# Altium PCB Reflectance.PcbDoc
Units mm, origin at the board's own origin, x right, y up, seen from the top; angles counter-clockwise.
Board outline 55.75 x 84.25 mm, 2 copper layers (Top Layer, Bottom Layer); 29 components, 116 nets, 107 pads, 0 vias.
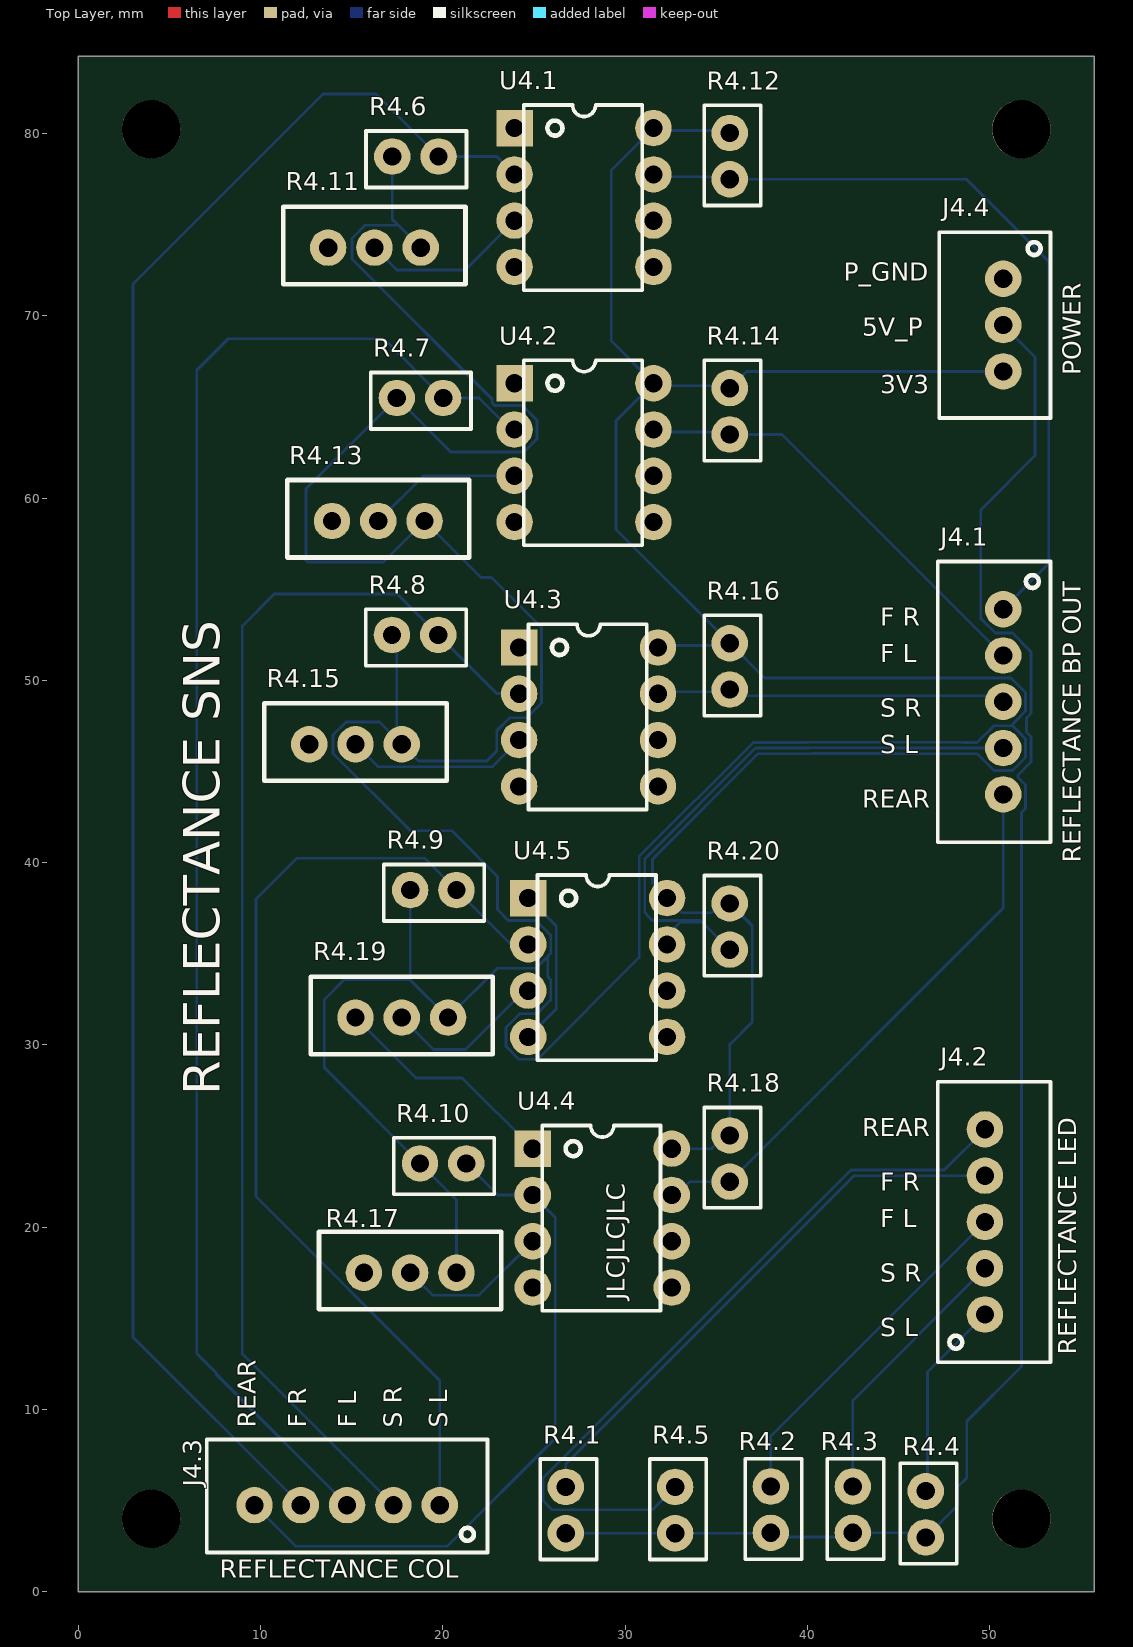
[diagram p0: Top Layer view]
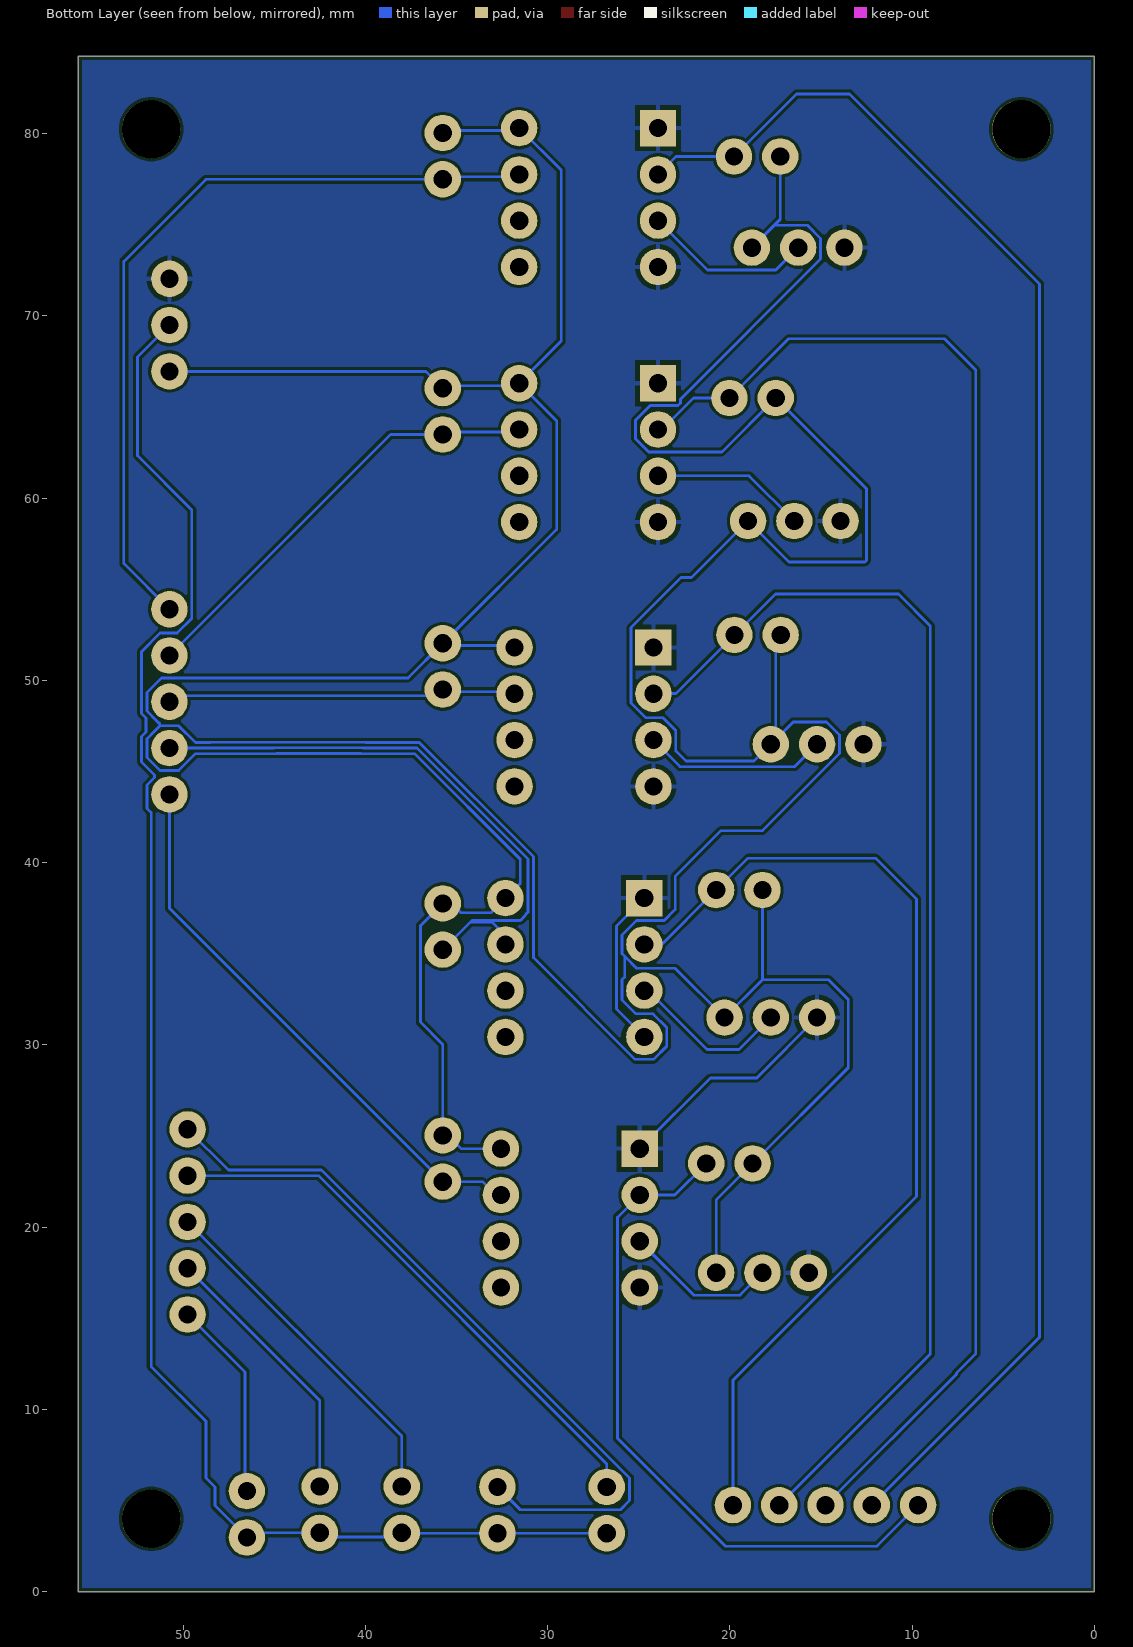
[diagram p1: Bottom Layer view, seen from below]
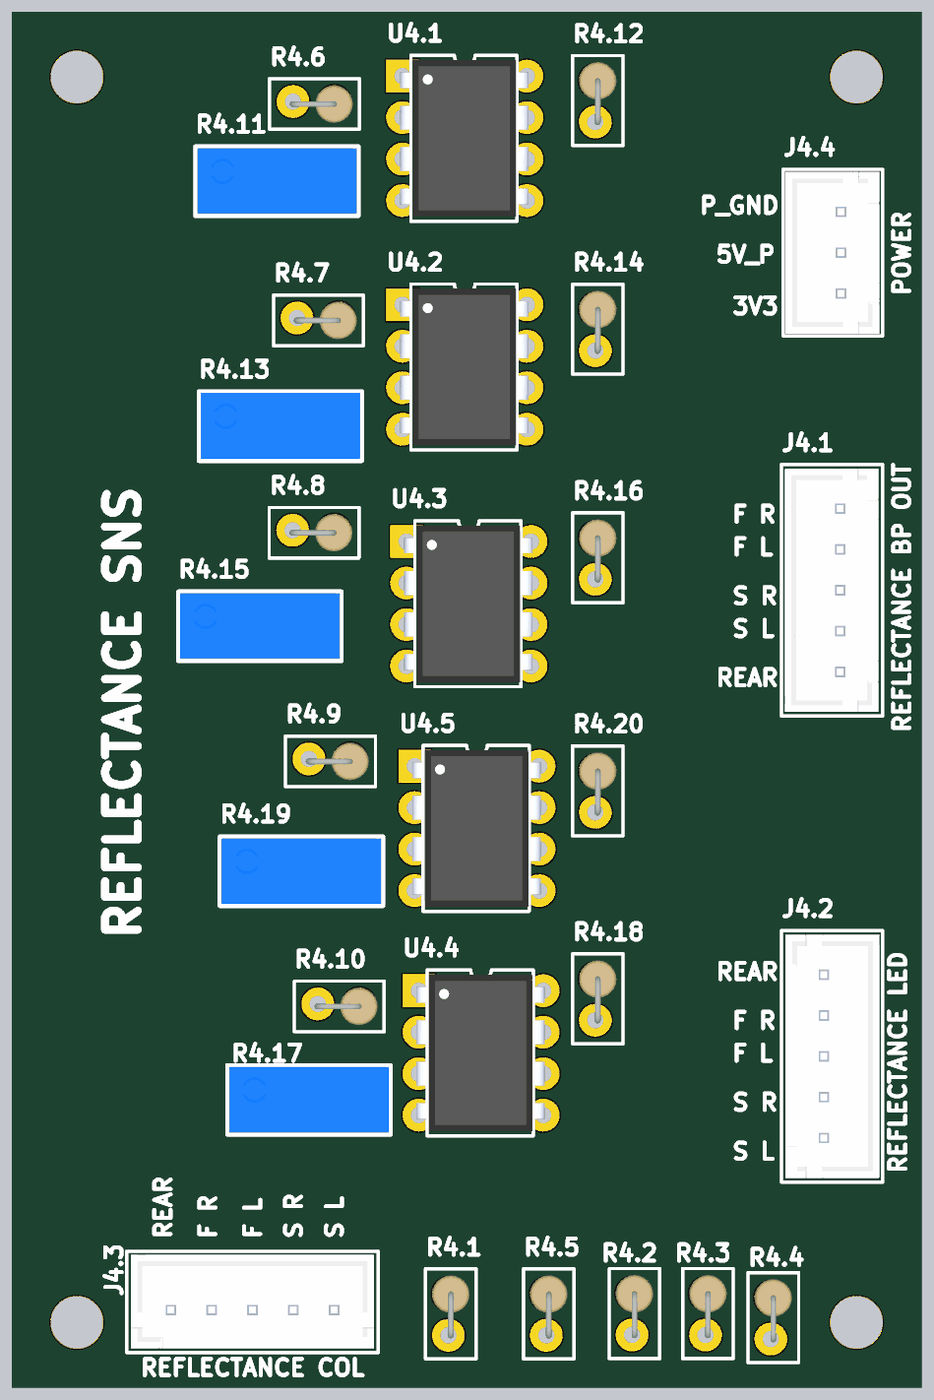
[diagram p2: 3D render of the assembled board from above, using the file's embedded part models]

## Layer stack, top to bottom
Top Solder: solder mask 0.0102, Solder Resist, Dk 3.5
Top Layer: signal copper 0.0356
Dielectric 1: dielectric 0.32, FR-4, Dk 4.8
Bottom Layer: signal copper 0.0356
Bottom Solder: solder mask 0.0102, Solder Resist, Dk 3.5

## Board outline
0,0 0,84.25 55.75,84.25 55.75,0

## Design rules (kind name [scope] priority, off if disabled: settings)
BoardOutlineClearance [All] p1: gap=0.2 ignorepadtopadclearanceinfootprint=FALSE
Clearance [All] p1: gap=0.152 ignorepadtopadclearanceinfootprint=FALSE
HoleSize [All] p1: absolutevalues=TRUE maxlimit=100 minlimit=0.4 maxpercent=80.000 minpercent=20.000
PolygonConnect [All] p1: connectstyle=Relief reliefconductorwidth=0.254 reliefentries=4 polygonreliefangle="90 Angle" airgapwidth=0.254
RoutingLayers [All] p1: top layer_v5=FALSE bottom layer_v5=TRUE
RoutingVias [All] p1: holewidth=0.4 width=0.8 viastyle="Through Hole" minholewidth=0.4 minwidth=0.6 maxholewidth=100 maxwidth=100
SilkToSilkClearance [All] p1: silktosilkclearance=0
SilkToSolderMaskClearance [IsPad] p1: minsilkscreentomaskgap=0 clearancetoexposedcopper=TRUE
SolderMaskExpansion [All] p1: expansion=0.102 istentingtop=FALSE
Width [All] p1: maxlimit=100 minlimit=0.152 preferedwidth=0.152
26 further rules are at their usual default settings.

## Components (designator, comment, footprint, x,y, rotation, side; value= is the part's Value field where it differs from the comment)
J4.1 "Reflectance Out to BP" "5POS JST" 50.75,48.83 r270 top
J4.2 "Internal IR LEDs" "5POS JST" 49.75,20.29 r90 top
J4.3 "Ref Sns Collector Output" "5POS JST" 14.75,4.75 r180 top
J4.4 "Power" "3pos JST" 50.75,69.5 r270 top
R4.1 "100" Res_Generic 26.75,4.48 r90 top
R4.2 "100" Res_Generic 38,4.5 r90 top
R4.3 "100" Res_Generic 42.5,4.5 r90 top
R4.4 "100" Res_Generic 46.5,4.25 r90 top
R4.5 "100" Res_Generic 32.75,4.48 r90 top
R4.6 "47k" Res_Generic 18.5,78.75 r0 top
R4.7 "47k" Res_Generic 18.75,65.5 r0 top
R4.8 "47k" Res_Generic 18.48,52.5 r0 top
R4.9 "47k" Res_Generic 19.48,38.5 r0 top
R4.10 "47k" Res_Generic 20.02,23.5 r0 top
R4.11 "10k" "Pot Generic" 16.25,73.75 r0 top
R4.12 "10k" Res_Generic 35.75,78.77 r90 top
R4.13 "10k" "Pot Generic" 16.46,58.75 r0 top
R4.14 "10k" Res_Generic 35.75,64.77 r90 top
R4.15 "10k" "Pot Generic" 15.21,46.5 r0 top
R4.16 "10k" Res_Generic 35.75,50.77 r90 top
R4.17 "10k" "Pot Generic" 18.21,17.5 r0 top
R4.18 "10k" Res_Generic 35.75,23.77 r90 top
R4.19 "10k" "Pot Generic" 17.75,31.5 r0 top
R4.20 "10k" Res_Generic 35.75,36.5 r90 top
U4.1 "LM311" DIP8 27.75,76.5 r0 top
U4.2 "LM311" DIP8 27.75,62.5 r0 top
U4.3 "LM311" DIP8 28,48 r0 top
U4.4 "LM311" DIP8 28.75,20.5 r0 top
U4.5 "LM311" DIP8 28.5,34.25 r0 top

## Footprints (in the part's own frame and the unit in brackets; to place one, negate y for a bottom-side part, rotate by r counter-clockwise, add the part's x,y. Pads: shape width x height; smd on the part's side, far side on the other; paste and mask are expansions set on the pad)
"3pos JST" [mm]
  round 2 hole 1: 1(-2.54,0) 2(0,0) 3(2.54,0)
  silkscreen extent -5.1,-3.5 5.1,2.6, body extent -4.95,-3.35 4.95,2.4, height 7
"5POS JST" [mm]
  round 2 hole 1: 1(-5.08,0) 2(-2.54,0) 3(0,0) 4(2.54,0) 5(5.08,0)
  silkscreen extent -7.7,-3.6 7.7,2.6, body extent -7.45,-3.4 7.45,2.35, height 7
DIP8 [mm]
  rect 2x2 hole 1: 1(-3.81,3.81)
  round 2 hole 1: 2(-3.81,1.27) 3(-3.81,-1.27) 4(-3.81,-3.81) 5(3.81,-3.81) 6(3.81,-1.27) 7(3.81,1.27) 8(3.81,3.81)
  silkscreen extent -3.3,-5.08 3.2,5.08, body extent -3.96,-4.79 3.91,4.79, height 5.33
"Pot Generic" [mm]
  round 2 hole 1: 1(-2.54,0) 2(0,0) 3(2.54,0)
  silkscreen extent -5,-2 5,2.25, body extent -4.89,-1.86 4.89,2.15, height 11.41
Res_Generic [mm] "Cap Generic THT Footprint"
  round 2 hole 1: 1(-1.27,0) 2(1.27,0)
  silkscreen extent -2.71,-1.7 2.8,1.4, body extent -1.47,-1.3 2.4,1, height 8.18

## Part data
J4.1 J4.2 J4.3: library part "5pos Conn", "5pos Conn JST"
J4.4: library part "3pos Conn", "3pos Conn"
R4.1 R4.2 R4.3 R4.4 R4.5 R4.6 R4.7 R4.8 R4.9 R4.10 R4.12 R4.14 R4.16 R4.18 R4.20: library part Res_Generic
R4.11 R4.13 R4.15 R4.17 R4.19: library part Pot_Generic
U4.1 U4.2 U4.3 U4.4 U4.5: library part "LM311 Comparator", "LM311 IC DIFF COMPARATOR STROBE 8-DIP", Supplier Part Number 1=595-LM311P, Supplier 1=Mouser

## Free pads (board coordinates)
  round 3.2 hole 3.2: ""(4,4) ""(4,80.25) ""(51.75,4) ""(51.75,80.25)

## Nets (pads, with @x,y where several pads share a name; then routed paths per layer and width w, separated by ;. In a path a pad name is that pad's centre, name@x,y a point inside that pad or via, vN(x,y) a via of type N, cw(c..) or ccw(c..) an arc to the next point about the centre after c; other vN are vias at no path point)
3.3V_P: J4.4.3 R4.6.1 R4.7.1 R4.8.1 R4.9.1 R4.10.1 R4.11.3 R4.12.2 R4.13.3 R4.14.2 R4.15.3 R4.16.2 R4.17.3 R4.18.2 R4.19.3 R4.20.2 U4.1.8 U4.2.8 U4.3.8 U4.4.8 U4.5.8 | length 318.8
  Bottom Layer w0.152: R4.8.1 17.48,52.23 R4.15.3@17.48,46.77 ; R4.6.1 17.23,75.31 17.561,74.979 ; R4.9.1 18.21,33.58 ; R4.11.3 17.561,74.979 ; R4.17.3 20.75,21.5 R4.10.1 13.5,28.75 13.5,32.5 14.58,33.58 18.21,33.58 ; U4.3.8 31.925,51.925 35.635,51.925 R4.16.2 ; U4.4.8 34.743,24.31 35.473,25.04 R4.18.2 35.75,30.025 36.979,31.254 36.979,36.541 R4.20.2 35.257,37.77 34.737,37.25 33.12,37.25 U4.5.8 31.5,38.87 31.5,40.193 37.293,45.985 40.235,45.985 40.25,46 44.876,46 44.891,45.985 49.317,45.985 50.241,45.061 51.196,45.061 51.259,45.061 51.618,45.42 51.979,45.781 51.979,46.799 51.618,47.16 51.259,47.519 ; R4.12.2 35.615,80.175 31.695,80.175 U4.1.8 29.25,78 29.25,68.62 U4.2.8 ; J4.4.3 36.67,66.96 R4.14.2 35.615,66.175 31.695,66.175 U4.2.8 ; R4.15.3@17.48,46.77 R4.15.3 18.674,45.576 22.411,45.576 22.961,46.127 22.961,47.239 23.681,47.959 24.616,47.959 25.419,48.761 25.419,52.905 22.673,55.651 22.099,55.651 R4.13.3 16.75,56.5 12.589,56.5 12.5,56.589 12.5,60.52 R4.7.1 20.439,62.541 24.449,62.541 25.169,63.261 25.169,64.279 24.366,65.081 22.845,65.081 22.711,65.215 22.711,65.43 15.021,73.12 15.021,74.259 15.741,74.979 17.561,74.979 ; R4.15.3@17.48,46.77 16.521,47.729 14.701,47.729 13.981,47.009 13.981,45.991 18.214,41.759 20.491,41.759 23,39.25 23,37.427 23.595,36.831 25.116,36.831 25.919,36.029 25.919,35.011 25.759,34.852 ; 18.21,33.58 R4.19.3 22.999,34.209 25.116,34.209 25.759,34.852 ; 25.759,34.852 25.759,33.741 25.919,33.582 25.919,32.471 25.157,31.71 24.21,31.71 23.461,30.961 23.461,29.931 24.181,29.211 25.199,29.211 30.777,34.789 30.777,40.331 37.04,46.595 39.983,46.595 39.997,46.61 48.485,46.61 48.5,46.595 49.317,46.595 50.241,47.519 51.259,47.519 ; U4.2.8 29.5,64.25 29.5,58.29 R4.16.2 ; R4.16.2 37.649,50.141 51.176,50.141 51.619,49.699 51.979,49.339 51.979,48.321 51.45,47.793 51.281,47.623 51.259,47.538 51.259,47.519
5V_ARM: 
5V_P: J4.4.2 R4.1.1 R4.2.1 R4.3.1 R4.4.1 R4.5.1 | length 93.3
  Bottom Layer w0.152: R4.1.1 R4.5.1 38.75,3.21 38.96,3 43.27,3 43.5,3.23 R4.4.1@46.73,3.23 ; R4.4.1 48.25,4.73 48.25,5.75 48.75,6.25 48.75,9.352 51.75,12.352 51.75,42.75 51.979,42.979 51.979,44.259 51.563,44.674 51.563,44.813 52.283,45.533 52.283,46.925 52.03,47.178 52.03,47.942 52.283,48.195 52.283,51.574 51.259,52.599 50.324,52.599 49.521,53.401 49.521,59.358 52.5,62.336 52.5,67.75 J4.4.2
5V_SERVO: 
8V: 
15V: 
ARM_SERV_BP_OUT: 
ARM_SERV_PWM: 
BOX_SERV_BP_OUT: 
BOX_SERV_PWM: 
BRIDGE_SERV_BP_OUT: 
BRIDGE_SERV_PWM: 
CLAW_SERV_BP_OUT: 
CLAW_SERV_PWM: 
DCLK: 
DIO: 
ECHO_F_M: 
ECHO_S_L: 
ECHO_S_R: 
ECHO_SPARE: 
ENCODER_L_I: 
ENCODER_L_Q: 
ENCODER_R_I: 
ENCODER_R_Q: 
IR_LEFT_TRANS: 
IR_RIGHT_TRANS: 
IR_SNS_LEFT: 
IR_SNS_RIGHT: 
LEFT+: 
LEFT-: 
LEFT_FWD: 
LEFT_FWD_BP_OUT: 
LEFT_REV: 
LEFT_REV_BP_OUT: 
M_GND: 
MAGNET_SNS: 
NetC1.8_2: 
NetC5.1_1: 
NetC5.1_2: 
NetC5.2_1: 
NetC5.2_2: 
NetQ2.1_2: 
NetQ2.1_3: 
NetQ2.2_2: 
NetQ2.2_3: 
NetQ2.3_2: 
NetQ2.3_3: 
NetQ2.4_2: 
NetQ2.4_3: 
NetQ3.1_2: 
NetQ3.1_3: 
NetQ3.2_2: 
NetQ3.2_3: 
NetQ3.3_2: 
NetQ3.3_3: 
NetQ3.4_2: 
NetQ3.4_3: 
NetQ3.5_1: 
NetQ3.6_1: 
NetQ3.7_1: 
NetQ3.8_1: 
NetR2.3_2: 
NetR2.6_2: 
NetR2.7_1: 
NetR2.8_1: 
NetR2.13_2: 
NetR2.14_2: 
NetR2.15_2: 
NetR2.16_2: 
NetR3.3_2: 
NetR3.4_1: 
NetR3.5_1: 
NetR3.6_2: 
NetR3.11_2: 
NetR3.12_2: 
NetR3.13_1: 
NetR3.14_2: 
NetR4.11_2: R4.11.2 U4.1.3 | length 9.3
  Bottom Layer w0.152: R4.11.2 17.479,72.521 21.231,72.521 U4.1.3
NetR4.13_2: R4.13.2 U4.2.3 | length 8.5
  Bottom Layer w0.152: R4.13.2 18.94,61.23 U4.2.3
NetR4.15_2: R4.15.2 U4.3.3 | length 10.1
  Bottom Layer w0.152: R4.15.2 16.439,45.271 22.731,45.271 U4.3.3
NetR4.17_2: R4.17.2 U4.4.3 | length 8.5
  Bottom Layer w0.152: R4.17.2 19.439,16.271 21.981,16.271 U4.4.3
NetR4.19_2: R4.19.2 U4.5.3 | length 9
  Bottom Layer w0.152: R4.19.2 19.5,29.75 21.25,29.75 24.48,32.98 U4.5.3
NetR5.2_1: 
NetR5.4_2: 
NetR5.7_1: 
NetR5.9_2: 
P_GND: J4.4.1 R4.11.1 R4.13.1 R4.15.1 R4.17.1 R4.19.1 U4.1.1 U4.1.4 U4.2.1 U4.2.4 U4.3.1 U4.3.4 U4.4.1 U4.4.4 U4.5.1 U4.5.4 | length 21.6
  Bottom Layer w0.152: R4.19.1 18.52,28.19 21.06,28.19 U4.4.1 ; U4.5.4 26.223,31.973 26.223,36.527 U4.5.1
REF_F_L_COL: J4.3.3 R4.7.2 U4.2.2 | length 85.9
  Bottom Layer w0.152: J4.3.3 7.569,11.931 7.569,12 6.5,13.069 6.5,67.022 8.228,68.75 16.77,68.75 R4.7.2 21.996,65.5 23.726,63.77 U4.2.2
REF_F_L_LED: J4.2.3 R4.2.2 | length 19.4
  Bottom Layer w0.152: R4.2.2 38,8.54 J4.2.3
REF_F_L_SNS: J4.1.2 R4.14.1 U4.2.7 | length 24.3
  Bottom Layer w0.152: U4.2.7 31.695,63.635 35.615,63.635 R4.14.1 38.62,63.5 J4.1.2
REF_F_R_COL: J4.3.4 R4.6.2 U4.1.2 | length 97.9
  Bottom Layer w0.152: J4.3.4 3,13.96 3,71.75 13.437,82.187 16.333,82.187 R4.6.2 22.96,78.75 U4.1.2
REF_F_R_LED: J4.2.4 R4.1.2 | length 30.8
  Bottom Layer w0.152: R4.1.2 26.75,7 42.58,22.83 J4.2.4
REF_F_R_SNS: J4.1.1 R4.12.1 U4.1.7 | length 43.8
  Bottom Layer w0.152: U4.1.7 31.695,77.635 35.615,77.635 R4.12.1 48.75,77.5 53.25,73 53.25,56.41 J4.1.1
REF_R_COL: J4.3.5 R4.10.2 U4.4.2 | length 38.1
  Bottom Layer w0.152: J4.3.5 11.92,2.5 20.25,2.5 26.169,8.419 26.169,20.541 U4.4.2 23.02,21.77 R4.10.2
REF_R_LED: J4.2.5 R4.5.2 | length 41.4
  Bottom Layer w0.152: R4.5.2 31.5,4.5 26,4.5 25.5,5 25.5,6.237 42.397,23.135 47.515,23.135 J4.2.5
REF_R_SNS: J4.1.5 R4.18.1 U4.4.7 | length 31
  Bottom Layer w0.152: U4.4.7 32.837,21.77 33.567,22.5 R4.18.1 50.75,37.5 J4.1.5
REF_S_L_COL: J4.3.1 R4.9.2 U4.5.2 | length 55.4
  Bottom Layer w0.152: J4.3.1 19.83,11.603 9.75,21.682 9.75,38 12,40.25 19,40.25 R4.9.2 23.984,35.266 24.077,35.266 U4.5.2
REF_S_L_LED: J4.2.1 R4.4.2 | length 11.1
  Bottom Layer w0.152: R4.4.2@46.598,5.4 46.598,12.058 J4.2.1
REF_S_L_SNS: J4.1.4 R4.20.1 U4.5.7 | length 33.4
  Bottom Layer w0.152: U4.5.7 32.31,36.02 33.04,36.75 34.23,36.75 ; R4.20.1 35.605,35.375 35.46,35.52 34.23,36.75 ; J4.1.4 45.018,46.29 45.003,46.305 40.124,46.305 40.109,46.29 37.166,46.29 31.081,40.205 31.081,37.35 31.081,37.287 31.123,37.246 cw(c31.015,37.138) 31.137,37.23 ccw(c34.023,39.375) 31.436,36.877 ccw(c31.545,36.984) 31.526,36.833 31.535,36.831 31.545,36.831 34.149,36.831 34.23,36.75
REF_S_R_COL: J4.3.2 R4.8.2 U4.3.2 | length 69.9
  Bottom Layer w0.152: J4.3.2 9,13.04 9,53 10.75,54.75 17.5,54.75 R4.8.2 22.961,49.289 24.171,49.289 U4.3.2
REF_S_R_LED: J4.2.2 R4.3.2 | length 15.6
  Bottom Layer w0.152: R4.3.2@42.5,5.163 42.5,10.5 J4.2.2
REF_S_R_SNS: J4.1.3 R4.16.1 U4.3.7 | length 19.3
  Bottom Layer w0.152: U4.3.7 31.925,49.385 35.635,49.385 R4.16.1 36.085,49.165 50.415,49.165 J4.1.3
RIGHT+: 
RIGHT-: 
RIGHT_FWD: 
RIGHT_FWD_BP_OUT: 
RIGHT_REV: 
RIGHT_REV_BP_OUT: 
SPARE_1: 
SW_CLAW+: 
SW_CLAW_SNS: 
SW_FRONT+: 
SW_FRONT_SNS: 
SW_REAR+: 
SW_REAR_SNS: 
TRIG_COM: 
pads on no net: U4.1.5 U4.1.6 U4.2.5 U4.2.6 U4.3.5 U4.3.6 U4.4.5 U4.4.6 U4.5.5 U4.5.6

## Polygon pours and split planes (outlines as drawn)
P_GND on Bottom Layer "GND " (solid, remove dead copper, pour order 0): 0,84.25 55.75,84.25 55.75,0 0,0

## Silkscreen, mask and mechanical layers (free items; w line width, h text height)
Top Overlay:
  text "P_GND" at 42.004,71.921 h1
  text "5V_P" at 43.004,68.921 h1
  text "POWER" at 54.996,66.754 h1 r90
  text "3V3" at 44.004,65.754 h1
  text "F R" at 44.004,53.004 h1
  text "F L" at 44.004,51.004 h1
  text "S R" at 44.004,48.004 h1
  text "S L" at 44.004,46.004 h1
  text "REAR" at 43.004,43.004 h1
  text "REFLECTANCE BP OUT" at 54.996,40.004 h1 r90
  text "REFLECTANCE SNS" at 7.75,27.25 h2 r90
  text "REAR" at 43.004,25.004 h1
  text "F R" at 44.004,22.004 h1
  text "F L" at 44.004,20.004 h1
  text "S R" at 44.004,17.004 h1
  text "JLCJLCJLC" at 29.996,16.004 h1 r90
  text "S L" at 44.004,14.004 h1
  text "REFLECTANCE LED" at 54.746,13.004 h1 r90
  text "REAR" at 9.746,9.004 h1 r90
  text "F R" at 12.496,9.004 h1 r90
  text "F L" at 15.246,9.004 h1 r90
  text "S R" at 17.746,9.004 h1 r90
  text "S L" at 20.246,9.004 h1 r90
  text "REFLECTANCE COL" at 7.754,0.754 h1
Mechanical 1:
  the board outline again, w0.2